# EAGLE board lidar (EAGLE 9.0.1)
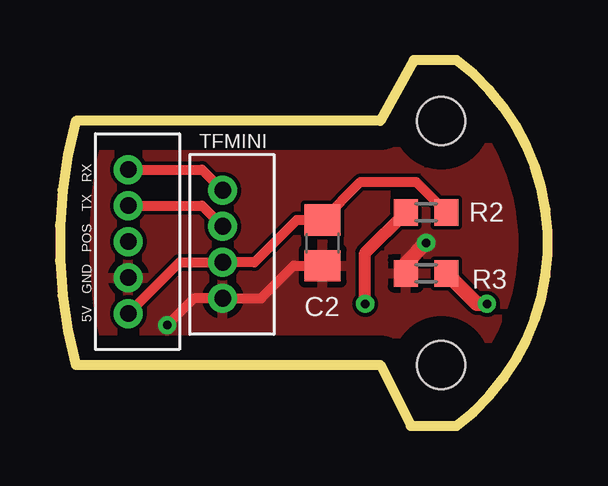
[diagram p0: board, top side]
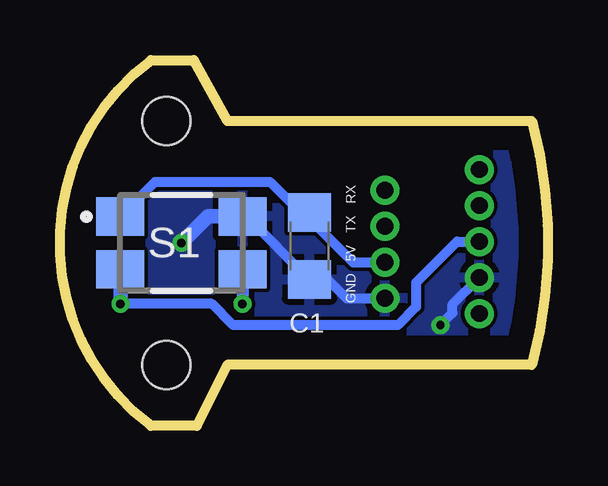
[diagram p1: board, bottom side, seen from below]

Size 20.34 x 15.24 mm. Coordinates in mm from the lower left corner, seen from the top.
Outline: 0.66,2.54 13.36,2.54 14.63,0 16.54,0 arc106 16.54,15.24 14.76,15.24 13.36,12.7 0.66,12.7 arc30 0.66,2.54
Copper layers (1*16): Top 0.035mm / dielectric 1.5mm / Bottom 0.035mm
Design rules "default": minimum track width 6mil, minimum drill 0.35mm, track to track 6mil, track to pad 6mil, pad to pad 6mil, via to via 6mil, smd to smd 6mil, copper to edge 40mil, drill to drill 6mil, minimum pad ring 10mil, minimum via ring 8mil, stop-mask expansion 4mil, vias tented up to drill 0mil, thermal gap 10mil
Holes 2 mm at 15.9,2.54 15.9,12.7

## Footprints (pad centres in the part's own frame; a part is rotated, then mirrored left to right if it is on the bottom)
C1206 = smd 1.6 x 1.8: 1 -1.4,0; 2 1.4,0
C0805 = smd 1.3 x 1.5: 1 -0.95,0; 2 0.95,0
B5B-ZR = drill 0.7: 1 7.5,-1.3; 2 6,-1.3; 3 4.5,-1.3; 4 3,-1.3; 5 1.5,-1.3
R0603 = smd 1 x 1.1: 1 -0.85,0; 2 0.85,0
EE-SX1320 = smd 2 x 1.6: 1 -2.55,1.1; 2 -2.55,-1.1; 3 2.55,-1.1; 4 2.55,1.1
B4B-ZR = drill 0.7: 1 6,-1.3; 2 4.5,-1.3; 3 3,-1.3; 4 1.5,-1.3

## Placement (x,y rotation side)
C1  [C1206]  9.93,7.49 270 bottom
C2  [C0805]  10.95,7.62 270 top
MB  B5B-ZR  [B5B-ZR]  1.55,3.17 90 top
R2  780r  [R0603]  15.27,8.89 0 top
R3  33k  [R0603]  15.27,6.35 0 top
S1  EE-SX1320  [EE-SX1320]  15.27,7.62 0 bottom
TFMINI  B4B-ZR  [B4B-ZR]  5.49,3.81 90 top

## Library data of the parts
C1 C2 = rcl; SPICEPREFIX: C
MB TFMINI = jst
R2 R3 = rcl; SPICEPREFIX: R
S1 = EE-SX1320; DESCRIPTION: Optical Switches, Transmissive, Phototransistor Output SMT, 2mm Transmissive Photo; HEIGHT: mm; MANUFACTURER_NAME: Omron Electronics; MANUFACTURER_PART_NUMBER: EE-SX1320; MOUSER_PART_NUMBER: 653-EESX1320

## Nets
+5V: C1.1 C2.1 MB.5 R2.2 S1.1 TFMINI.3
GND: C1.2 C2.2 MB.4 R3.1 S1.4 TFMINI.4
N$1: R2.1 S1.3
POS_INT: MB.3 R3.2 S1.2
RX: MB.1 TFMINI.1
TX: MB.2 TFMINI.2

## Tracks (layer width: path | path; a pad name or v marks a point on that pad's centre or on a via)
+5V
  Top 0.406: R2.2 14.85,10.16 12.54,10.16 C2.1 9.87,8.57 8.11,6.81 TFMINI.3 4.99,6.81 MB.5
  Bottom 0.406: TFMINI.3 8.11,6.81 10.19,8.89 C1.1 10.31,8.89 11.58,10.16 16.38,10.16 S1.1
  Bottom 0.61: S1.1
GND  (via drill 0.35)
  Top 0.406: C2.2 9.75,6.67 8.39,5.31 TFMINI.4 5.59,5.31 v4.47,4.19
  Top 0.61: R3.1 14.42,6.77 v15.27,7.62
  Bottom 0.406: C1.2 9.17,6.09 8.39,5.31 TFMINI.4 | 10.31,6.42 C1.2 | C1.2 12.56,8.72 S1.4 | v4.47,4.19 3.96,4.7 3.96,5.06 MB.4
  Bottom 0.61: 12.55,8.89 S1.4 14.17,8.72 v15.27,7.62
  pour Bottom: -3.78,19.05 -3.78,-3.81 25.43,-3.81 25.43,19.05
  pour Top: -1.24,15.24 -1.24,-1.27 22.89,-1.27 22.89,16.51 -1.24,16.51
N$1  (via drill 0.35)
  Top 0.508: v12.73,5.08 12.73,7.2 R2.1
  Bottom 0.508: S1.3 v12.73,5.08
POS_INT  (via drill 0.35)
  Top 0.61: v17.81,5.08 17.39,5.08 R3.2
  Bottom 0.406: v17.81,5.08 14,5.08 13.11,4.19 6.25,4.19 5.49,4.95 5.49,5.97 4.35,7.11 3.78,7.67 MB.3
  Bottom 0.61: S1.2 v17.81,5.08
RX
  Top 0.406: MB.1 5.92,10.68 TFMINI.1
TX
  Top 0.406: MB.2 5.92,9.18 TFMINI.2

## Text on the board
tNames: 5V GND POS TX RX
bNames: GND 5V TX RX